# EAGLE board CT_schematic (EAGLE 7.6.0)

Size 100 x 80 mm. Coordinates in mm from the lower left corner, seen from the top.
Outline: 0,0 100,0 100,80 0,80 0,0
Copper layers (1*16): Top 0.035mm / dielectric 1.5mm / Bottom 0.035mm
Design rules "default": minimum track width 10mil, minimum drill 24mil, track to track 8mil, track to pad 8mil, pad to pad 8mil, via to via 8mil, smd to smd 8mil, copper to edge 40mil, drill to drill 8mil, minimum pad ring 10mil, minimum via ring 8mil, stop-mask expansion 4mil, vias tented up to drill 0mil, thermal gap 10mil

## Footprints (pad centres in the part's own frame; a part is rotated, then mirrored left to right if it is on the bottom)
C0603 = smd 0.8 x 0.8: 1 -0.762,0; 2 0.762,0
C0402 = smd 0.5 x 0.5: 1 -0.508,0; 2 0.508,0
C1210 = smd 1.2 x 2.5: 1 -1.524,0; 2 1.524,0
C0805 = smd 1.2 x 1.3: 1 -1.016,0; 2 1.016,0
2220 = smd 1.85 x 5.5: 1 -2.55,0; 2 2.55,0
EXV-9H = smd 3.505 x 1.676: 1 -2.857,0; 2 2.857,0
L0603 = smd 0.8 x 0.8: 1 -0.762,0; 2 0.762,0
DR1040 = smd 1.6 x 3.2: 1 -4.458,0; 2 4.458,0
PJ-037B_PACKAGE = drill 3.7 square: 1 12,0 | drill 3.2 square: 2 6,0
R0603 = smd 0.8 x 0.8: 1 -0.762,0; 2 0.762,0
UFBGA144 = smd 0.32 x 0.32: A1 -2.75,2.75; A2 -2.25,2.75; A3 -1.75,2.75; A4 -1.25,2.75; A5 -0.75,2.75; A6 -0.25,2.75; A7 0.25,2.75; A8 0.75,2.75; A9 1.25,2.75; A10 1.75,2.75; A11 2.25,2.75; A12 2.75,2.75; B1 -2.75,2.25; B2 -2.25,2.25; B3 -1.75,2.25; B4 -1.25,2.25; B5 -0.75,2.25; B6 -0.25,2.25; B7 0.25,2.25; B8 0.75,2.25; B9 1.25,2.25; B10 1.75,2.25; B11 2.25,2.25; B12 2.75,2.25; C1 -2.75,1.75; C2 -2.25,1.75; C3 -1.75,1.75; C4 -1.25,1.75; C5 -0.75,1.75; C6 -0.25,1.75; C7 0.25,1.75; C8 0.75,1.75; C9 1.25,1.75; C10 1.75,1.75; C11 2.25,1.75; C12 2.75,1.75; D1 -2.75,1.25; D2 -2.25,1.25; D3 -1.75,1.25; D4 -1.25,1.25; D5 -0.75,1.25; D6 -0.25,1.25; D7 0.25,1.25; D8 0.75,1.25; D9 1.25,1.25; D10 1.75,1.25; D11 2.25,1.25; D12 2.75,1.25; E1 -2.75,0.75; E2 -2.25,0.75; E3 -1.75,0.75; E4 -1.25,0.75; E5 -0.75,0.75; E6 -0.25,0.75; E7 0.25,0.75; E8 0.75,0.75; E9 1.25,0.75; E10 1.75,0.75; E11 2.25,0.75; E12 2.75,0.75; F1 -2.75,0.25; F2 -2.25,0.25; F3 -1.75,0.25; F4 -1.25,0.25; F5 -0.75,0.25; F6 -0.25,0.25; F7 0.25,0.25; F8 0.75,0.25; F9 1.25,0.25; F10 1.75,0.25; F11 2.25,0.25; F12 2.75,0.25; G1 -2.75,-0.25; G2 -2.25,-0.25; G3 -1.75,-0.25; G4 -1.25,-0.25; G5 -0.75,-0.25; G6 -0.25,-0.25; G7 0.25,-0.25; G8 0.75,-0.25; G9 1.25,-0.25; G10 1.75,-0.25; G11 2.25,-0.25; G12 2.75,-0.25; H1 -2.75,-0.75; H2 -2.25,-0.75; H3 -1.75,-0.75; H4 -1.25,-0.75; H5 -0.75,-0.75; H6 -0.25,-0.75; H7 0.25,-0.75; H8 0.75,-0.75; H9 1.25,-0.75; H10 1.75,-0.75; H11 2.25,-0.75; H12 2.75,-0.75; J1 -2.75,-1.25; J2 -2.25,-1.25; J3 -1.75,-1.25; J4 -1.25,-1.25; J5 -0.75,-1.25; J6 -0.25,-1.25; J7 0.25,-1.25; J8 0.75,-1.25; J9 1.25,-1.25; J10 1.75,-1.25; J11 2.25,-1.25; J12 2.75,-1.25; K1 -2.75,-1.75; K2 -2.25,-1.75; K3 -1.75,-1.75; K4 -1.25,-1.75; K5 -0.75,-1.75; K6 -0.25,-1.75; K7 0.25,-1.75; K8 0.75,-1.75; K9 1.25,-1.75; K10 1.75,-1.75; K11 2.25,-1.75; K12 2.75,-1.75; L1 -2.75,-2.25; L2 -2.25,-2.25; L3 -1.75,-2.25; L4 -1.25,-2.25; L5 -0.75,-2.25; L6 -0.25,-2.25; L7 0.25,-2.25; L8 0.75,-2.25; L9 1.25,-2.25; L10 1.75,-2.25; L11 2.25,-2.25; L12 2.75,-2.25; M1 -2.75,-2.75; M2 -2.25,-2.75; M3 -1.75,-2.75; M4 -1.25,-2.75; M5 -0.75,-2.75; M6 -0.25,-2.75; M7 0.25,-2.75; M8 0.75,-2.75; M9 1.25,-2.75; M10 1.75,-2.75; M11 2.25,-2.75; M12 2.75,-2.75
ARDUCAM = drill 1 pad 1.8 square: 1 0,0 | drill 1 pad 1.8: 2 0,2.54; 3 2.54,0; 4 2.54,2.54; 5 5.08,0; 6 5.08,2.54; 7 7.62,0; 8 7.62,2.54; 9 10.16,0; 10 10.16,2.54; 11 12.7,0; 12 12.7,2.54; 13 15.24,0; 14 15.24,2.54; 15 17.78,0; 16 17.78,2.54; 17 20.32,0; 18 20.32,2.54; 19 22.86,0; 20 22.86,2.54
SOIC-8 = smd 1.6 x 0.6: 1 -2.7,1.905 | smd 1.55 x 0.6: 2 -2.7,0.635; 3 -2.7,-0.635; 4 -2.7,-1.905; 5 2.7,-1.905; 6 2.7,-0.635; 7 2.7,0.635; 8 2.7,1.905
TST-110-05-T-D-RA = drill 1 pad 1.7 square: 1 0,0 | drill 1 pad 1.7: 2 0,2.54; 3 2.54,0; 4 2.54,2.54; 5 5.08,0; 6 5.08,2.54; 7 7.62,0; 8 7.62,2.54; 9 10.16,0; 10 10.16,2.54; 11 12.7,0; 12 12.7,2.54; 13 15.24,0; 14 15.24,2.54; 15 17.78,0; 16 17.78,2.54; 17 20.32,0; 18 20.32,2.54; 19 22.86,0; 20 22.86,2.54
SMD-8 = smd 0.72 x 0.6: 1 -1.45,-0.7; 2 -0.485,-0.7; 3 0.485,-0.7; 4 1.455,-0.7; 5 1.455,0.7; 6 0.485,0.7; 7 -0.485,0.7; 8 -1.455,0.7
QFN-28 = smd 0.813 x 0.305: 1 -2.451,1.5; 2 -2.451,1; 3 -2.451,0.5; 4 -2.451,0; 5 -2.451,-0.5; 6 -2.451,-1; 7 -2.451,-1.5; 15 2.451,-1.5; 16 2.451,-1; 17 2.451,-0.5; 18 2.451,0; 19 2.451,0.5; 20 2.451,1; 21 2.451,1.5 | smd 0.305 x 0.813: 8 -1.5,-2.451; 9 -1,-2.451; 10 -0.5,-2.451; 11 0,-2.451; 12 0.5,-2.451; 13 1,-2.451; 14 1.5,-2.451; 22 1.5,2.451; 23 1,2.451; 24 0.5,2.451; 25 0,2.451; 26 -0.5,2.451; 27 -1,2.451; 28 -1.5,2.451 | smd 3.607 x 3.607: 29 0,0
SJ-43515TS-SMT-TR = smd 2.2 x 3: 1 0.6,-7.4; 4 3.4,-7.4 | smd 3 x 3: 2 12.8,-7.4; 5 17,-3 | smd 2 x 3: 3 5.3,0; 6 2.5,0 | drill 1.8: P$7 4.5,-3.69; P$8 11.54,-3.69
ASEK = smd 1.4 x 1: 1 -1.1,-0.8; 2 1.1,-0.8; 3 1.1,0.8; 4 -1.1,0.8
ASFL1 = smd 1.7 x 1.5: 1 -1.27,-1.1; 2 1.27,-1.1; 3 1.27,1.1; 4 -1.27,1.1
IDT74FCT38072 = smd 0.51 x 1: 1 0,0; 2 1.27,0; 3 2.54,0; 4 3.81,0; 5 3.81,4.95; 6 2.54,4.95; 7 1.27,4.95; 8 0,4.95
QFN-16_EP = smd 0.805 x 0.3: 1 -1.452,0.75; 2 -1.452,0.25; 3 -1.452,-0.25; 4 -1.452,-0.75; 9 1.452,-0.75; 10 1.452,-0.25; 11 1.452,0.25; 12 1.452,0.75 | smd 0.3 x 0.805: 5 -0.75,-1.452; 6 -0.25,-1.452; 7 0.25,-1.452; 8 0.75,-1.452; 13 0.75,1.452; 14 0.25,1.452; 15 -0.25,1.452; 16 -0.75,1.452 | smd 1.55 x 1.55: 17 0,0
SON-6 = smd 0.55 x 0.3: 1 -0.355,0.5 | smd 0.52 x 0.3: 2 -0.37,0; 3 -0.37,-0.5; 4 0.37,-0.5; 5 0.37,0; 6 0.37,0.5
SW_4-1437565-2 = smd 1.4 x 2.1: 1 -2.23,4.55; 2 -2.23,-4.55; 3 2.23,4.55; 4 2.23,-4.55
LGM67K-G1J2-24-Z = smd 0.8 x 1.4: A -2,0; C 0,0
NC7SZ125M5X = smd 1.3 x 0.7: 1 -1.3,0.95; 2 -1.3,0; 3 -1.3,-0.95; 4 1.3,-0.95; 5 1.3,0.95

## Placement (x,y rotation side)
C1  1e-06  [C0603]  -50.8,74.93 0 top  (outside the outline)
C2  1e-07  [C0603]  -54.61,74.93 0 top  (outside the outline)
C3  1e-07  [C0603]  -58.42,74.93 0 top  (outside the outline)
C4  1e-07  [C0603]  -62.23,74.93 0 top  (outside the outline)
C5  1e-07  [C0603]  -66.04,74.93 0 top  (outside the outline)
C6  1e-07  [C0603]  -69.85,74.93 0 top  (outside the outline)
C7  1e-07  [C0603]  -73.66,74.93 0 top  (outside the outline)
C8  1e-07  [C0603]  -77.47,74.93 0 top  (outside the outline)
C9  1e-07  [C0603]  -81.28,74.93 0 top  (outside the outline)
C10  1e-07  [C0603]  -15.24,80.01 0 top  (outside the outline)
C11  1e-07  [C0603]  -19.05,80.01 0 top  (outside the outline)
C12  1e-07  [C0603]  -22.86,80.01 0 top  (outside the outline)
C13  1e-07  [C0603]  -26.67,80.01 0 top  (outside the outline)
C14  4.7e-06  [C0603]  -39.37,74.93 0 top  (outside the outline)
C15  1e-08  [C0603]  -30.48,80.01 0 top  (outside the outline)
C16  1e-06  [C0603]  -34.29,80.01 0 top  (outside the outline)
C17  1e-07  [C0603]  -38.1,80.01 0 top  (outside the outline)
C18  2.2e-06  [C0603]  -43.18,74.93 0 top  (outside the outline)
C19  2.2e-06  [C0603]  -46.99,74.93 0 top  (outside the outline)
C20  1e-06  [C0603]  -41.91,80.01 0 top  (outside the outline)
C21  1e-08  [C0402]  -30.48,85.09 0 top  (outside the outline)
C22  1e-07  [C0402]  -34.29,85.09 0 top  (outside the outline)
C23  1e-07  [C0402]  -38.1,85.09 0 top  (outside the outline)
C24  1e-06  [C0603]  -45.72,80.01 0 top  (outside the outline)
C25  1e-06  [C0603]  -49.53,80.01 0 top  (outside the outline)
C26  2.2e-05  [C1210]  -68.58,58.42 0 top  (outside the outline)
C27  2.2e-05  [C1210]  -74.93,58.42 0 top  (outside the outline)
C28  1e-09  [C0402]  -41.91,85.09 0 top  (outside the outline)
C29  1e-09  [C0402]  -45.72,85.09 0 top  (outside the outline)
C30  1e-07  [C0402]  -49.53,85.09 0 top  (outside the outline)
C31  1e-07  [C0402]  -53.34,85.09 0 top  (outside the outline)
C32  1e-07  [C0402]  -57.15,85.09 0 top  (outside the outline)
C33  1e-07  [C0402]  -60.96,85.09 0 top  (outside the outline)
C34  1e-07  [C0402]  -64.77,85.09 0 top  (outside the outline)
C35  1e-05  [C0805]  -34.29,64.77 0 top  (outside the outline)
C36  1e-05  [C0805]  -39.37,64.77 0 top  (outside the outline)
C37  1e-05  [C0805]  -44.45,64.77 0 top  (outside the outline)
C38  1e-05  [C0805]  -49.53,64.77 0 top  (outside the outline)
C39  1e-05  [C0805]  -54.61,64.77 0 top  (outside the outline)
C40  1e-08  [C0402]  -68.58,85.09 0 top  (outside the outline)
C41  1e-08  [C0402]  -72.39,85.09 0 top  (outside the outline)
C42  1e-08  [C0402]  -76.2,85.09 0 top  (outside the outline)
C43  1e-08  [C0402]  -80.01,85.09 0 top  (outside the outline)
C44  1e-05  [C0805]  -59.69,64.77 0 top  (outside the outline)
C45  1e-06  [C0603]  -53.34,80.01 0 top  (outside the outline)
C46  1e-07  [C0402]  -15.24,90.17 0 top  (outside the outline)
C47  6.8e-05  [2220]  -33.02,33.02 0 top  (outside the outline)
C48  1e-07  [C0402]  -19.05,90.17 0 top  (outside the outline)
C49  0.0001  [EXV-9H]  -38.1,50.8 0 top  (outside the outline)
C50  0.0001  [EXV-9H]  -49.53,50.8 0 top  (outside the outline)
C51  1e-08  [C0402]  -22.86,90.17 0 top  (outside the outline)
C52  1e-08  [C0402]  -26.67,90.17 0 top  (outside the outline)
C53  1e-08  [C0402]  -30.48,90.17 0 top  (outside the outline)
F1  240.0  [L0603]  -57.15,80.01 0 top  (outside the outline)
I1  3.8e-06  [DR1040]  -71.12,20.32 0 top  (outside the outline)
J1  PJ-037B  [PJ-037B_PACKAGE]  -27.94,21.59 0 top  (outside the outline)
R2  1000.0  [R0603]  -60.96,80.01 0 top  (outside the outline)
R7  4700.0  [R0603]  -64.77,80.01 0 top  (outside the outline)
R8  4700.0  [R0603]  -68.58,80.01 0 top  (outside the outline)
R9  2200.0  [R0603]  -72.39,80.01 0 top  (outside the outline)
R11  2200.0  [R0603]  -76.2,80.01 0 top  (outside the outline)
R13  10000.0  [R0603]  -80.01,64.77 0 top  (outside the outline)
R14  10000.0  [R0603]  -15.24,69.85 0 top  (outside the outline)
R15  10000.0  [R0603]  -20.32,69.85 0 top  (outside the outline)
R16  10000.0  [R0603]  -25.4,69.85 0 top  (outside the outline)
R17  10000.0  [R0603]  -30.48,69.85 0 top  (outside the outline)
R18  10000.0  [R0603]  -35.56,69.85 0 top  (outside the outline)
R19  10000.0  [R0603]  -40.64,69.85 0 top  (outside the outline)
R20  10000.0  [R0603]  -45.72,69.85 0 top  (outside the outline)
R21  10000.0  [R0603]  -50.8,69.85 0 top  (outside the outline)
R22  10000.0  [R0603]  -55.88,69.85 0 top  (outside the outline)
R23  10000.0  [R0603]  -60.96,69.85 0 top  (outside the outline)
R24  10000.0  [R0603]  -66.04,69.85 0 top  (outside the outline)
R25  10000.0  [R0603]  -71.12,69.85 0 top  (outside the outline)
R26  22.0  [R0603]  -80.01,80.01 0 top  (outside the outline)
R27  47000.0  [R0603]  -76.2,69.85 0 top  (outside the outline)
R28  47000.0  [R0603]  -81.28,69.85 0 top  (outside the outline)
R29  47000.0  [R0603]  -15.24,74.93 0 top  (outside the outline)
R30  680.0  [R0603]  -15.24,85.09 0 top  (outside the outline)
R31  20000.0  [R0603]  -20.32,74.93 0 top  (outside the outline)
R32  91000.0  [R0603]  -25.4,74.93 0 top  (outside the outline)
R33  300000.0  [R0603]  -64.77,64.77 0 top  (outside the outline)
R34  10000.0  [R0603]  -30.48,74.93 0 top  (outside the outline)
R35  10000.0  [R0603]  -35.56,74.93 0 top  (outside the outline)
R36  9100.0  [R0603]  -19.05,85.09 0 top  (outside the outline)
R37  680000.0  [R0603]  -69.85,64.77 0 top  (outside the outline)
R38  120000.0  [R0603]  -74.93,64.77 0 top  (outside the outline)
U1  STM32F446ZEH6  [UFBGA144]  -60.96,20.32 0 top  (outside the outline)
U2  arducam_ov2640  [ARDUCAM]  -40.64,55.88 0 top  (outside the outline)
U3  AT25M01-SSHM-T  [SOIC-8]  -24.13,33.02 0 top  (outside the outline)
U4  TST-110-05-T-D-RA  [TST-110-05-T-D-RA]  -64.77,39.37 0 top  (outside the outline)
U5  TMD27711  [SMD-8]  -29.21,64.77 0 top  (outside the outline)
U6  WM8731CLSEFL  [QFN-28]  -60.96,58.42 0 top  (outside the outline)
U7  SJ-43515TS-SMT-TR  [SJ-43515TS-SMT-TR]  -39.37,10.16 0 top  (outside the outline)
U8  SJ-43515TS-SMT-TR  [SJ-43515TS-SMT-TR]  -67.31,10.16 0 top  (outside the outline)
U9  ASEK-32.768KHz-ECST  [ASEK]  -29.21,50.8 0 top  (outside the outline)
U10  ASFL1-12.288MHZ-EC-T  [ASFL1]  -54.61,33.02 0 top  (outside the outline)
U11  ASFL1-25MHZ-NCS  [ASFL1]  -71.12,33.02 0 top  (outside the outline)
U12  idt74fct38072  [IDT74FCT38072]  -29.21,39.37 0 top  (outside the outline)
U13  LTC3601EUD#PBF  [QFN-16_EP]  -24.13,85.09 0 top  (outside the outline)
U14  TPS3895ADRYR  [SON-6]  -33.02,88.9 0 top  (outside the outline)
U15  4-1437565-2  [SW_4-1437565-2]  -44.45,21.59 0 top  (outside the outline)
U16  Q65110A2395  [LGM67K-G1J2-24-Z]  -48.26,58.42 0 top  (outside the outline)
U17  nc7sz125m5x  [NC7SZ125M5X]  -80.01,57.15 0 top  (outside the outline)
U18  nc7sz125m5x  [NC7SZ125M5X]  -15.24,63.5 0 top  (outside the outline)
U19  nc7sz125m5x  [NC7SZ125M5X]  -21.59,63.5 0 top  (outside the outline)

## Library data of the parts
C1-C53 F1 I1 J1 R2 R7-R9 R11 R13-R38 U1-U19 = circuit_tree

## Nets
CLK_U1_B1: U1.B1 U9.3
CLK_U1_D1: U1.D1 U12.6
CLK_U2_8: U2.8 U12.7
CLK_U6_1: U6.1 U10.3
CLK_U12_3: U11.3 U12.3
GND: C1.2 C2.2 C3.2 C4.2 C5.2 C6.2 C7.2 C8.2 C9.2 C10.2 C11.2 C12.2 C13.2 C14.2 C15.2 C16.2 C17.2 C18.2 C19.2 C20.2 C21.2 C22.2 C23.2 C24.2 C25.2 C29.2 C30.2 C31.2 C32.2 C33.2 C34.2 C35.2 C36.2 C37.2 C38.2 C39.2 C40.2 C41.2 C42.2 C43.2 C44.2 C45.2 C47.1 C47.2 C48.2 C49.2 C50.2 C51.2 C52.2 C53.2 J1.2 R2.2 R13.2 R15.2 R24.2 R27.2 R28.2 R29.2 R31.2 R33.2 R36.2 R38.2 U1.D2 U1.E6 U1.E7 U1.G4 U1.G8 U1.G10 U1.H6 U1.J1 U1.K1 U2.2 U2.20 U3.4 U4.4 U4.6 U4.8 U4.10 U4.12 U4.14 U4.16 U4.18 U4.20 U5.3 U6.4 U6.15 U6.19 U6.25 U6.26 U6.29 U7.1 U8.1 U9.2 U10.2 U11.2 U12.4 U12.5 U12.8 U13.1 U13.9 U13.17 U14.2 U16.C U17.2 U17.3 U18.1 U18.3 U19.1 U19.3
NET_U1_B5: R11.1 U1.B5 U5.8
NET_U1_C5: R9.1 U1.C5 U5.2
NET_U1_D5: R13.1 U1.D5
NET_U1_E5: R14.1 U1.E5
NET_U1_F1: R7.1 U1.F1 U18.4
NET_U1_G9: C19.1 U1.G9
NET_U1_H5: R15.1 U1.H5
NET_U1_H7: C18.1 U1.H7
NET_U1_M1: C15.1 C16.1 F1.1 U1.L1 U1.M1
NET_U1_M10: U16.A
NET_U1_M12: U15.3 U15.4
NET_U2_19: R8.1 U2.19 U19.4
NET_U3_3: R16.1 U3.3
NET_U3_7: R18.1 U3.7
NET_U4_19: R24.1 U4.19
NET_U5_4: C25.1 R26.1 U5.4
NET_U5_5: U5.5
NET_U5_6: U5.6
NET_U5_7: R25.1 U5.7
NET_U6_9: U6.9
NET_U6_20: C34.1 C39.1 U6.20
NET_U7_2: C27.1 R28.1 U7.2
NET_U7_5: C26.1 R27.1 U7.5
NET_U7_13: C26.2
NET_U7_14: C27.2
NET_U8_5: C28.1 C29.1 R29.1 R30.1 U8.5
NET_U8_21: R30.2
NET_U8_22: C28.2
NET_U13_3: C46.2 I1.1 U13.3 U13.4
NET_U13_6: C46.1 U13.6
NET_U13_7: C45.1 U13.7 U13.12
NET_U13_10: R33.1 U13.10
NET_U13_11: R31.1 R32.1 U13.11
NET_U13_14: U13.14
NET_U13_ATNET_3: I1.2 R32.2
NET_U14_1: R35.1 R36.1 U14.1
NET_U14_3: R37.2 R38.1 U14.3
NET_U14_4: R34.1 U14.4 U17.4 U18.2 U19.2
NET_U15_1: R2.1 U15.1 U15.2
PROC_DCMI_D0: U1.D12 U2.18
PROC_DCMI_D1: U1.D11 U2.17
PROC_DCMI_D2: U1.A5 U2.16
PROC_DCMI_D3: U1.A4 U2.15
PROC_DCMI_D4: U1.B2 U2.14
PROC_DCMI_D5: U1.C6 U2.13
PROC_DCMI_D6: U1.B3 U2.12
PROC_DCMI_D7: U1.B4 U2.11
PROC_DCMI_D8: U1.B11 U2.10
PROC_DCMI_D9: U1.C10 U2.9
PROC_DCMI_HSYNC: U1.J3 U2.6
PROC_DCMI_PIXCLK: U1.L3 U2.7
PROC_DCMI_VSYNC: U1.D6 U2.5
PROC_I2S2_CK: U1.F12 U6.7
PROC_I2S2_SD: U1.H4 U6.8
PROC_I2S2_WS: U1.M11 U6.9 U6.11
PROC_SPI2_MISO: U3.2
PROC_SPI2_MOSI: U3.5
PROC_SPI2_NSS: R17.1 U3.1
PROC_SPI2_SCK: U3.6
PROC_SYS_JTCK_SWCLK: R22.1 U4.9
PROC_SYS_JTDI: R20.1 U4.5
PROC_SYS_JTDO_SWO: U4.13
PROC_SYS_JTMS_SWDIO: R21.1 U4.7
PROC_SYS_JTRST: R19.1 U4.3
RST_OUT_U4_SRESET_B: R23.1 U4.15 U17.1
VCC_S1_11V2: C44.1 C49.1 C50.1 J1.1 U13.15 U13.16
VCC_TIER1_3V3: C1.1 C2.1 C3.1 C4.1 C5.1 C6.1 C7.1 C8.1 C9.1 C10.1 C11.1 C12.1 C13.1 C14.1 C17.1 C20.1 C21.1 C22.1 C23.1 C24.1 C30.1 C31.1 C32.1 C33.1 C35.1 C36.1 C37.1 C38.1 C40.1 C41.1 C42.1 C43.1 C47.2 C48.1 C51.1 C52.1 C53.1 F1.2 I1.2 R7.2 R8.2 R9.2 R11.2 R14.2 R16.2 R17.2 R18.2 R19.2 R20.2 R21.2 R22.2 R23.2 R25.2 R26.2 R32.2 R34.2 R35.2 R37.1 U1.C2 U1.C11 U1.D3 U1.F4 U1.F5 U1.F6 U1.F7 U1.F8 U1.F9 U1.F10 U1.G5 U1.G6 U1.G7 U2.1 U3.8 U4.1 U4.2 U5.1 U6.3 U6.5 U6.12 U6.18 U9.4 U10.4 U11.4 U12.1 U12.2 U13.8 U14.6 U17.5 U18.5 U19.5

## Tracks (layer width: path | path; a pad name or v marks a point on that pad's centre or on a via)
CLK_U1_B1  (1 unrouted)
CLK_U1_D1  (1 unrouted)
CLK_U2_8  (1 unrouted)
CLK_U6_1  (1 unrouted)
CLK_U12_3  (1 unrouted)
GND  (108 unrouted)
NET_U1_B5  (2 unrouted)
NET_U1_C5  (2 unrouted)
NET_U1_D5  (1 unrouted)
NET_U1_E5  (1 unrouted)
NET_U1_F1  (2 unrouted)
NET_U1_G9  (1 unrouted)
NET_U1_H5  (1 unrouted)
NET_U1_H7  (1 unrouted)
NET_U1_M1  (4 unrouted)
NET_U1_M12  (1 unrouted)
NET_U2_19  (2 unrouted)
NET_U3_3  (1 unrouted)
NET_U3_7  (1 unrouted)
NET_U4_19  (1 unrouted)
NET_U5_4  (2 unrouted)
NET_U5_7  (1 unrouted)
NET_U6_20  (2 unrouted)
NET_U7_2  (2 unrouted)
NET_U7_5  (2 unrouted)
NET_U8_5  (4 unrouted)
NET_U13_3  (3 unrouted)
NET_U13_6  (1 unrouted)
NET_U13_7  (2 unrouted)
NET_U13_10  (1 unrouted)
NET_U13_11  (2 unrouted)
NET_U13_ATNET_3  (1 unrouted)
NET_U14_1  (2 unrouted)
NET_U14_3  (2 unrouted)
NET_U14_4  (4 unrouted)
NET_U15_1  (2 unrouted)
PROC_DCMI_D0  (1 unrouted)
PROC_DCMI_D1  (1 unrouted)
PROC_DCMI_D2  (1 unrouted)
PROC_DCMI_D3  (1 unrouted)
PROC_DCMI_D4  (1 unrouted)
PROC_DCMI_D5  (1 unrouted)
PROC_DCMI_D6  (1 unrouted)
PROC_DCMI_D7  (1 unrouted)
PROC_DCMI_D8  (1 unrouted)
PROC_DCMI_D9  (1 unrouted)
PROC_DCMI_HSYNC  (1 unrouted)
PROC_DCMI_PIXCLK  (1 unrouted)
PROC_DCMI_VSYNC  (1 unrouted)
PROC_I2S2_CK  (1 unrouted)
PROC_I2S2_SD  (1 unrouted)
PROC_I2S2_WS  (2 unrouted)
PROC_SPI2_NSS  (1 unrouted)
PROC_SYS_JTCK_SWCLK  (1 unrouted)
PROC_SYS_JTDI  (1 unrouted)
PROC_SYS_JTMS_SWDIO  (1 unrouted)
PROC_SYS_JTRST  (1 unrouted)
RST_OUT_U4_SRESET_B  (2 unrouted)
VCC_S1_11V2  (5 unrouted)
VCC_TIER1_3V3  (89 unrouted)